# Altium PCB GR_LED.PcbDoc
Units mil, origin at the board's own origin, x right, y up, seen from the top; angles counter-clockwise.
Board outline 3937.01 x 433.07 mil, 2 copper layers (Top Layer, Bottom Layer); 15 components, 12 nets, 48 pads, 0 vias.
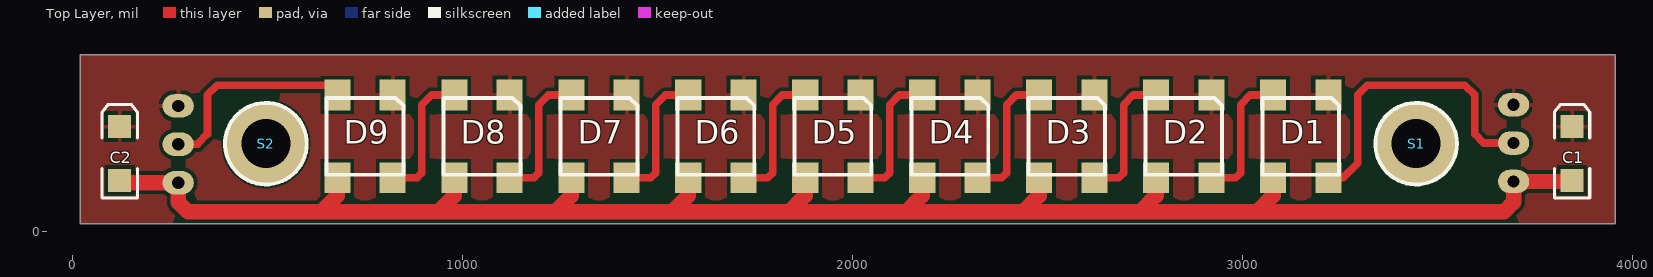
[diagram p0: Top Layer view]
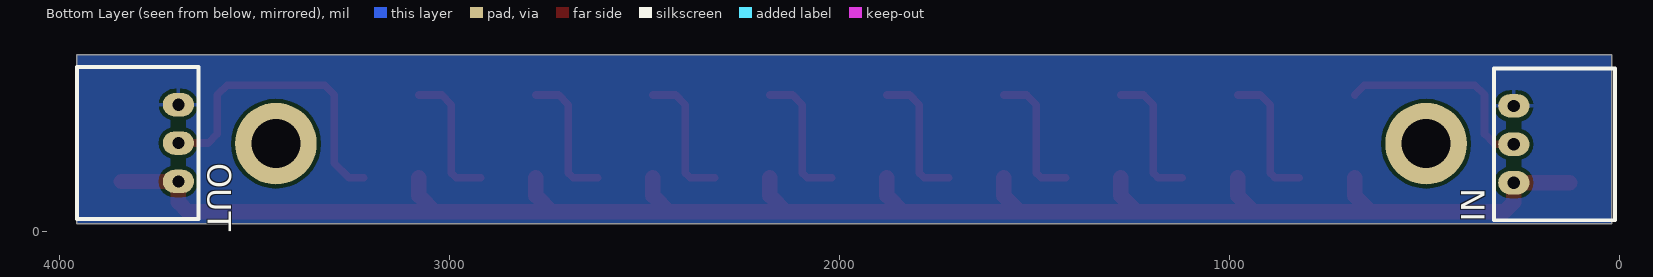
[diagram p1: Bottom Layer view, seen from below]

## Layer stack, top to bottom
Top Solder: solder mask 0.4, Solder Resist, Dk 3.5
Top Layer: signal copper 1.4
Dielectric 1: dielectric 12.6, FR-4, Dk 4.8
Bottom Layer: signal copper 1.4
Bottom Solder: solder mask 0.4, Solder Resist, Dk 3.5

## Board outline
19.68,19.68 3956.69,19.68 3956.69,452.76 19.68,452.76

## Design rules (kind name [scope] priority, off if disabled: settings)
Clearance [All] p1: gap=10
PolygonConnect [All] p1: connectstyle=Relief reliefconductorwidth=10 reliefentries=4 polygonreliefangle="90 Angle" airgapwidth=10
RoutingVias [All] p1: holewidth=28 width=50 viastyle="Through Hole" minholewidth=28 minwidth=50 maxholewidth=28 maxwidth=50
SolderMaskExpansion [All] p1: expansion=4
Width [All] p1: maxlimit=78.74 minlimit=10 preferedwidth=10 minimp=50.000000 maximp=50.000000 favimp=50.000000
30 further rules are at their usual default settings.

## Components (designator, comment, footprint, x,y, rotation, side; value= is the part's Value field where it differs from the comment)
C1 "Cap2" 3.2X1.6X1.1 3846.26,200 r90 top
C2 "Cap2" 3.2X1.6X1.1 121.26,200 r90 top
D1 "NeoPixel" Neopixel 3221.26,350 r270 top
D2 "NeoPixel" Neopixel 2921.26,350 r270 top
D3 "NeoPixel" Neopixel 2621.26,350 r270 top
D4 "NeoPixel" Neopixel 2321.26,350 r270 top
D5 "NeoPixel" Neopixel 2021.26,350 r270 top
D6 "NeoPixel" Neopixel 1721.26,350 r270 top
D7 "NeoPixel" Neopixel 1421.26,350 r270 top
D8 "NeoPixel" Neopixel 1121.26,350 r270 top
D9 "NeoPixel" Neopixel 821.26,350 r270 top
IN "Header 3H" "Molex SPOX 3x1H" 271.26,125 r90 bottom
OUT "Header 3H" "Molex SPOX 3x1H" 3696.26,325 r270 bottom
S1 "Screw M3" "Screw M3" 3446.26,225 r0 top
S2 "Screw M3" "Screw M3" 496.26,225 r0 top

## Footprints (in the part's own frame and the unit in brackets; to place one, negate y for a bottom-side part, rotate by r counter-clockwise, add the part's x,y. Pads: shape width x height; smd on the part's side, far side on the other; paste and mask are expansions set on the pad)
3.2X1.6X1.1 [mm] "SMT LED; 2 Flat Leads"
  rect 1.5x1.5 smd: 1(-1.75,0) 2(1.75,0)
  silkscreen extent -2.9,-1.15 3.2,1.15
"Molex SPOX 3x1H" [mil] "Prise CI, Molex, 3 Contacts, 1 rangée, entraxe 2.5mm, 3A, Coudé, ref 22-03-5035"
  oval 60x80 hole 31.5: 1(0,0) 2(98.43,0) 3(196.85,0)
  silkscreen extent -96,-260 293,51, body extent -96,-260 293,51, height 193
Neopixel [mm]
  rect 2x1.7 smd: 1(0,0) 2(0,-3.6) 3(5.4,-3.6) 4(5.4,0)
  silkscreen extent 0.2,-4.3 5.2,0.7, body extent 0.19,-4.33 5.19,0.67, height 2
"Screw M3" [mm] "M3 iso Screw"
  round 5.32 hole 3.2 unplated: 0(0,0)
  silkscreen extent -2.66,-2.66 2.66,2.66

## Part data
C1 C2: "Capacitor"
IN OUT: "Header, 3-Pin, Right Angle"

## Nets (pads, with @x,y where several pads share a name; then routed paths per layer and width w, separated by ;. In a path a pad name is that pad's centre, name@x,y a point inside that pad or via, vN(x,y) a via of type N, cw(c..) or ccw(c..) an arc to the next point about the centre after c; other vN are vias at no path point)
5V: C1.1 C2.1 D1.3 D2.3 D3.3 D4.3 D5.3 D6.3 D7.3 D8.3 D9.3 IN.1 OUT.3 | length 4782
  Top Layer w39.37: C2.1@127.36,125 IN.1 271.26,75 296.26,50 637.8,50 ; D9.3 679.53,91.73 637.8,50 ; D8.3 979.53,91.73 937.8,50 ; D7.3 1279.53,91.73 1237.8,50 ; D6.3 1579.53,91.73 1537.8,50 ; D5.3 1879.53,91.73 1837.8,50 ; D4.3 2179.53,91.73 2137.8,50 ; D3.3 2479.53,91.73 2437.8,50 ; D2.3 2779.53,91.73 2737.8,50 ; 3037.8,50 3079.53,91.73 D1.3 ; C1.1@3843.31,128.15 OUT.3 3696.26,75 3671.26,50 2737.8,50 ; 637.8,50 937.8,50 ; 937.8,50 1237.8,50 ; 1237.8,50 1537.8,50 ; 1537.8,50 1837.8,50 ; 1837.8,50 2137.8,50 ; 2137.8,50 2437.8,50 ; 2437.8,50 2737.8,50
GND: C1.2 C2.2 D1.1 D2.1 D3.1 D4.1 D5.1 D6.1 D7.1 D8.1 D9.1 IN.3 OUT.1
NetD1_1: D1.4 OUT.2 | length 796
  Top Layer w19.68: D1.4 3258.66,137.4 3296.26,175 3296.26,350 3321.26,375 3571.26,375 3596.26,350 3596.26,250 3619.68,226.57 OUT.2
NetD1_3: D1.2 D2.4 | length 348.8
  Top Layer w19.68: D2.4 2983.66,137.4 2996.26,150 2996.26,325 3021.26,350 D1.2
NetD2_3: D2.2 D3.4 | length 348.8
  Top Layer w19.68: D3.4 2683.66,137.4 2696.26,150 2696.26,325 2721.26,350 D2.2
NetD3_3: D3.2 D4.4 | length 348.8
  Top Layer w19.68: D4.4 2383.66,137.4 2396.26,150 2396.26,325 2421.26,350 D3.2
NetD4_3: D4.2 D5.4 | length 348.8
  Top Layer w19.68: D5.4 2083.66,137.4 2096.26,150 2096.26,325 2121.26,350 D4.2
NetD5_3: D5.2 D6.4 | length 348.8
  Top Layer w19.68: D6.4 1783.66,137.4 1796.26,150 1796.26,325 1821.26,350 D5.2
NetD6_3: D6.2 D7.4 | length 348.8
  Top Layer w19.68: D7.4 1483.66,137.4 1496.26,150 1496.26,325 1521.26,350 D6.2
NetD7_3: D7.2 D8.4 | length 348.8
  Top Layer w19.68: D8.4 1183.66,137.4 1196.26,150 1196.26,325 1221.26,350 D7.2
NetD8_3: D8.2 D9.4 | length 348.8
  Top Layer w19.68: D9.4 883.66,137.4 896.26,150 896.26,325 921.26,350 D8.2
NetD9_3: D9.2 IN.2 | length 540.9
  Top Layer w19.68: IN.2 321.26,223.43 321.26,225 346.26,250 346.26,350 371.26,375 654.53,375 D9.2
pads on no net: S1.0 S2.0

## Polygon pours and split planes (outlines as drawn)
GND on Top Layer "Top_GND" (solid, remove dead copper, pour order 0): 19.68,19.68 3956.69,19.69 3956.69,452.76 19.68,452.76
GND on Bottom Layer "Bottom_GND" (solid, remove dead copper, pour order 2): 19.68,19.68 3956.69,19.68 3956.69,452.76 19.68,452.76

## Silkscreen, mask and mechanical layers (free items; w line width, h text height)
Mechanical 2:
  the board outline again, w10

## Dimensions
19.68,452.76 to 19.68,19.68 on Mechanical 1
19.68,452.76 to 3956.69,452.76 on Mechanical 1